# Altium PCB SensWear-V1R0-Temperature.PcbDoc
Units mm, origin at the board's own origin, x right, y up, seen from the top; angles counter-clockwise.
Board outline 13 x 5.5 mm, 4 copper layers (Top Layer, Layer 1, Layer 2, Bottom Layer), stack 0.148 mm thick; 3 components, 10 nets, 22 pads, 10 vias.
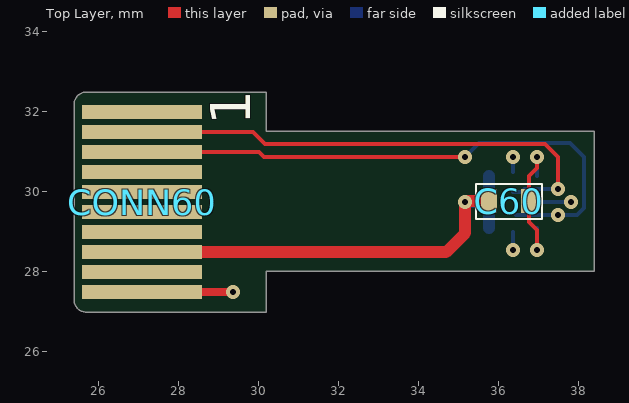
[diagram p0: Top Layer view]
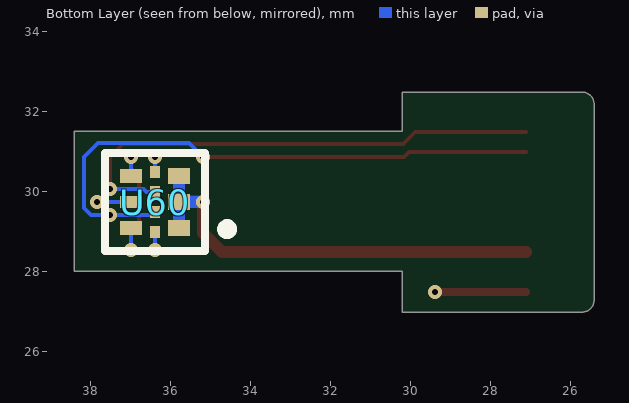
[diagram p1: Bottom Layer view, seen from below]
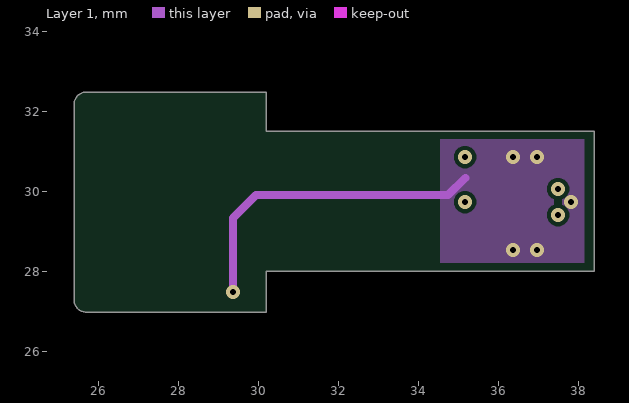
[diagram p2: Layer 1]
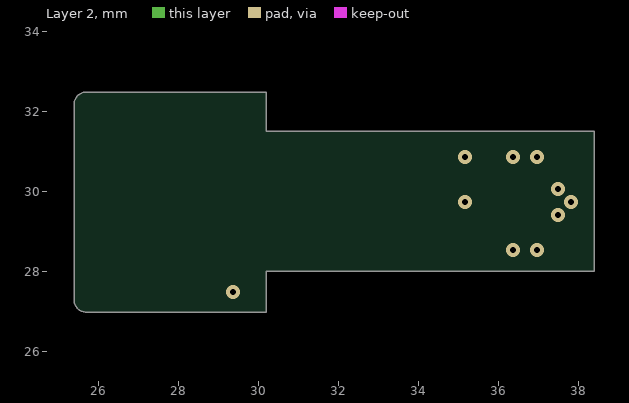
[diagram p3: Layer 2]

## Layer stack, top to bottom
Top Solder: solder mask 0.0275, Solder Resist, Dk 2.9
Top Layer: signal copper 0.012
Dielectric 2: prepreg 0.0375, PP-006, Dk 3.3
Layer 1: signal copper 0.012
Dielectric 1: prepreg 0.025, FR-4, Dk 3.3
Layer 2: signal copper 0.012
Dielectric 3: prepreg 0.0375, PP-006, Dk 3.3
Bottom Layer: signal copper 0.012
Bottom Solder: solder mask 0.0275, Solder Resist, Dk 2.9

## Board outline
25.7,26.975 cw(c25.7,27.275) 25.4,27.275 25.4,32.175 cw(c25.7,32.175) 25.7,32.475 30.2,32.475 30.2,31.5 38.4,31.5 38.4,28 30.2,28 30.2,26.975

## Design rules (kind name [scope] priority, off if disabled: settings)
AcuteAngle [All] p1: minimum=7.50000000000000E+0001 checktracksonly=FALSE
BoardOutlineClearance [All] p1: gap=0.2 ignorepadtopadclearanceinfootprint=FALSE
Clearance Clearance_BGA [IsTrack vs IsBGA] p1: gap=0.2 ignorepadtopadclearanceinfootprint=FALSE
Clearance [All] p2: gap=0.1 ignorepadtopadclearanceinfootprint=FALSE
ComponentClearance [All] p1: gap=0.1 collisioncheckmode=3 verticalgap=0.1 showdistances=FALSE
MinimumSolderMaskSliver [All] p1: minsoldermaskwidth=0.12
PolygonConnect [All] p1: thpad.connectstyle=Relief thpad.reliefconductorwidth=0.254 thpad.reliefentries=4 thpad.polygonreliefangle="90 Angle" thpad.airgapwidth=0.254 smdpad.connectstyle=Relief smdpad.reliefconductorwidth=0.254 smdpad.reliefentries=4 smdpad.polygonreliefangle="90 Angle" smdpad.airgapwidth=0.254 via.connectstyle=Direct via.reliefconductorwidth=0.254 via.reliefentries=4 via.polygonreliefangle="90 Angle" via.airgapwidth=0.254
RoutingVias [All] p1: holewidth=0.15 width=0.35 viastyle="Through Hole" minholewidth=0.15 minwidth=0.35 maxholewidth=0.711 maxwidth=1.27
SilkToSilkClearance [All] p1: silktosilkclearance=0.1
SilkToSolderMaskClearance [IsPad] p1: minsilkscreentomaskgap=0.1 clearancetoexposedcopper=TRUE
SolderMaskExpansion [All] p1: expansion=0 istentingtop=FALSE
Width Width_50Ohm [IsTrack and HasParameter('Impedance') and HasParameterValue('Impedance', '50')] p1: maxlimit=0.254 minlimit=0.076 preferedwidth=0.254 toplayer_minwidth=0.254 midlayer1_maxwidth=0.076 midlayer1_prefwidth=0.076 midlayer2_maxwidth=0.076 midlayer2_prefwidth=0.076 bottomlayer_minwidth=0.254 minimp=50.000000 maximp=50.000000 favimp=50.000000 checkconnectedcopper=TRUE
Width [All] p2: maxlimit=1 minlimit=0.076 preferedwidth=0.1
26 further rules are at their usual default settings.

## Components (designator, comment, footprint, x,y, rotation, side; value= is the part's Value field where it differs from the comment)
C60 "0.1 uF" CAPC1005X05N 36.275,29.75 r0 top
CONN60 "NC" 51281-1098-PCB 26.9,27.475 r0 top
U60 "MAX30208CLB+T" FP-L1022-2-MFG 36.375,29.725 r0 bottom

## Footprints (in the part's own frame and the unit in brackets; to place one, negate y for a bottom-side part, rotate by r counter-clockwise, add the part's x,y. Pads: shape width x height; smd on the part's side, far side on the other; paste and mask are expansions set on the pad)
51281-1098-PCB [mm]
  rect 3x0.35 smd paste-400 mask+0: 1(0.2,0) 2(0.2,0.5) 3(0.2,1) 4(0.2,1.5) 5(0.2,2) 6(0.2,2.5) 7(0.2,3) 8(0.2,3.5) 9(0.2,4) 10(0.2,4.5)
CAPC1005X05N [mm] "Chip Capacitor, 2-Leads, Body 1.00x0.50mm, IPC Medium Density"
  rect 0.4x0.6 smd mask+0.04: 1(-0.5,0) 2(0.5,0)
  silkscreen extent -0.82,-0.45 0.82,0.43, body extent -0.55,-0.3 0.55,0.3, height 0.6
FP-L1022-2-MFG [mm]
  rect 0.55x0.4 smd paste+0 mask+0: 1(-0.6,0.65) 2(-0.6,0) 3(-0.6,-0.65)
  rect 0.55x0.35 smd paste+0 mask+0: 4(0.6,-0.65) 6(0.6,0.65)
  rect 0.55x0.3 smd paste+0 mask+0: 5(0.6,0)
  rect 0.25x0.3 smd paste+0 mask+0: 7(0,0.75) 8(0,0.25) 9(0,-0.25) 10(0,-0.75)
  silkscreen extent -1.92,-1.22 1.25,1.22, body extent -1,-1 1,1, height 0.85

## Part data
C60: library part GRM155R61C104KA88D, "CAP CER 0.1UF 16V X5R 0402", Capacitance - nF="100 nF", Capacitance - pF="100000 pF", Case Code - in=0402, Case Code - mm=1005, Dielectric=X5R, Manufacturer="Murata Electronics", Maximum Operating Temperature="+ 85 C", Minimum Operating Temperature="- 55 C", Package / Case="0402 (1005 metric)", Supplier Part Number 1=81-GRM155R61C104KA8D, Tolerance="10 %", Voltage Rating DC="16 VDC", Brand="Murata Electronics", Capacitance="0.1 uF", Category="Multilayer Ceramic Capacitors MLCC - SMD/SMT", ComponentLink1Description=http://www.mouser.com/datasheet/2/281/murata_03052018_GRM_Series_1-1310166.pdf, ComponentLink1URL=http://www.mouser.com/datasheet/2/281/murata_03052018_GRM_Series_1-1310166.pdf, Height="0.5 mm", Length="1 mm", Manufacturer Part Number=GRM155R61C104KA88D, Minimum Order Quantity=1, Packaging="Cut Tape", Pricing="1=0.082, 10=0.026, 100=0.011, 500=0.008, 1000=0.007, 2500=0.006, 5000=0.005, 10000=0.004 (EUR)", Product="General Type MLCCs", Reeling=True, RoHS="RoHS Compliant", RoHS - Mouser=Y, Series=GRM, Standard Pack Qty=10000, Stock=0, Supplier 1=Mouser, Supplier 2=Digikey, Supplier 3=Digikey, Supplier Part Number 2=490-5415-1-ND, Supplier Part Number 3=490-5415-6-ND, Termination=Standard, Termination Style=SMD/SMT, Type="Chip Multilayer Ceramic Capacitor for General Purpose", Width="0.5 mm"
CONN60: library part 51281-1098-PCB, System=Connector
U60: "I2C Digital Temperature Sensor Serial I2C 10-Pin Thin LGA T/R", Manufacturer=Maxim, Supplier Part Number=700-MAX30208CLB+T, Category="Temperature and Humidity Sensors", Checked=FALSE, Manufacturer Part Number=MAX30208CLB+T, Pricing="1=3.7, 10=2.9, 50=2.9, 100=2.69, 1000=2.11, 10000=1.97 (USD)", RoHS=Yes, Stock=16152, Supplier=Mouser, Supplier 1=Mouser, Supplier 2=Digikey, Supplier 3=Digikey, Supplier Part Number 1=700-MAX30208CLB+T, Supplier Part Number 2=175-MAX30208CLB+TDKR-ND, Supplier Part Number 3=175-MAX30208CLB+TTR-ND

## Via types
v1: diameter 0.35, hole 0.15, Top Layer to Bottom Layer, tented both sides, 10 vias

## Nets (pads, with @x,y where several pads share a name; then routed paths per layer and width w, separated by ;. In a path a pad name is that pad's centre, name@x,y a point inside that pad or via, vN(x,y) a via of type N, cw(c..) or ccw(c..) an arc to the next point about the centre after c; other vN are vias at no path point)
1V8: C60.1 CONN60.3 U60.1 U60.2 U60.3 | length 11.6
  Top Layer w0.3: CONN60.3 34.7,28.475 35.175,28.95 v1(35.175,29.725) 35.188,29.725 35.213,29.75 C60.1
  Bottom Layer w0.3: v1(35.175,29.725) U60.2 ; U60.1 U60.2 ; U60.3 U60.2
GND: C60.2 CONN60.1 U60.4 U60.5 U60.6 U60.7 U60.10 | length 15.5
  Top Layer w0.1: v1(36.975,28.525) 36.975,29.025 36.775,29.225 C60.2 36.775,30.375 36.975,30.575 v1(36.975,30.85)
  Top Layer w0.2: CONN60.1 v1(29.375,27.475)
  Layer 1 w0.2: v1(29.375,27.475) 29.375,29.325 29.95,29.9 34.75,29.9 35.183,30.333
  Bottom Layer w0.1: v1(36.375,28.525) U60.7 ; U60.10 v1(36.375,30.85) ; v1(36.975,28.525) U60.6 ; U60.5 v1(37.825,29.725) ; U60.4 v1(36.975,30.85)
GPIO_0: CONN60.7
GPIO_1: CONN60.6
GPIO_2: CONN60.5
GPIO_3: CONN60.4
SCL: CONN60.9 U60.9 | length 12.6
  Top Layer w0.1: CONN60.9 29.871,31.475 30.171,31.175 37.175,31.175 37.5,30.85 v1(37.5,30.05)
  Bottom Layer w0.1: U60.9 36.588,29.975 36.663,30.05 v1(37.5,30.05)
SDA: CONN60.8 U60.8 | length 14.6
  Top Layer w0.1: CONN60.8 30.025,30.975 30.15,30.85 v1(35.175,30.85)
  Layer 2 w0.1: v1(35.175,30.85) v1@35.215,30.81
  Bottom Layer w0.1: v1(35.175,30.85) 35.525,31.2 37.8,31.2 38.15,30.85 38.15,29.575 37.975,29.4 v1(37.5,29.4) 36.45,29.4 U60.8
V_REG_IO: CONN60.2
V_SYS: CONN60.10

## Polygon pours and split planes (outlines as drawn)
GND on Layer 1 "GND_L02_P000" (solid, pour order 0): 34.55,31.4 38.15,31.4 38.15,28.2 34.55,28.2

## Silkscreen, mask and mechanical layers (free items; w line width, h text height)
Board:
  the board outline again, w0.1
Top Assembly:
  lines w0.1: 25.4,24.3 25.4,34.3 ; 30.2,24.55 30.2,33.875 ; 34.175,34.3 34.2,24.525 ; 38.4,23.75 38.4,33.75 ; 38.4,24.75 38.4,35.05

## Dimensions
25.4,34.3 to 38.4,33.75 on Fab Notes
25.4,24.3 to 30.2,24.55 on Fab Notes
34.175,34.3 to 38.4,28 on Fab Notes
30.2,32.475 to 34.2,24.525 on Fab Notes
38.425,28 to 38.425,31.5 on Fab Notes

## Text inside footprints (layer, text, board x,y; h text height)
CONN60: Top Overlay "1" at 29.8,31.65 h1 r90; Fab Notes "Stiffner" at 26.15,25.975 h0.4